# EAGLE board ATtiny85 Programmer (EAGLE 6.3)
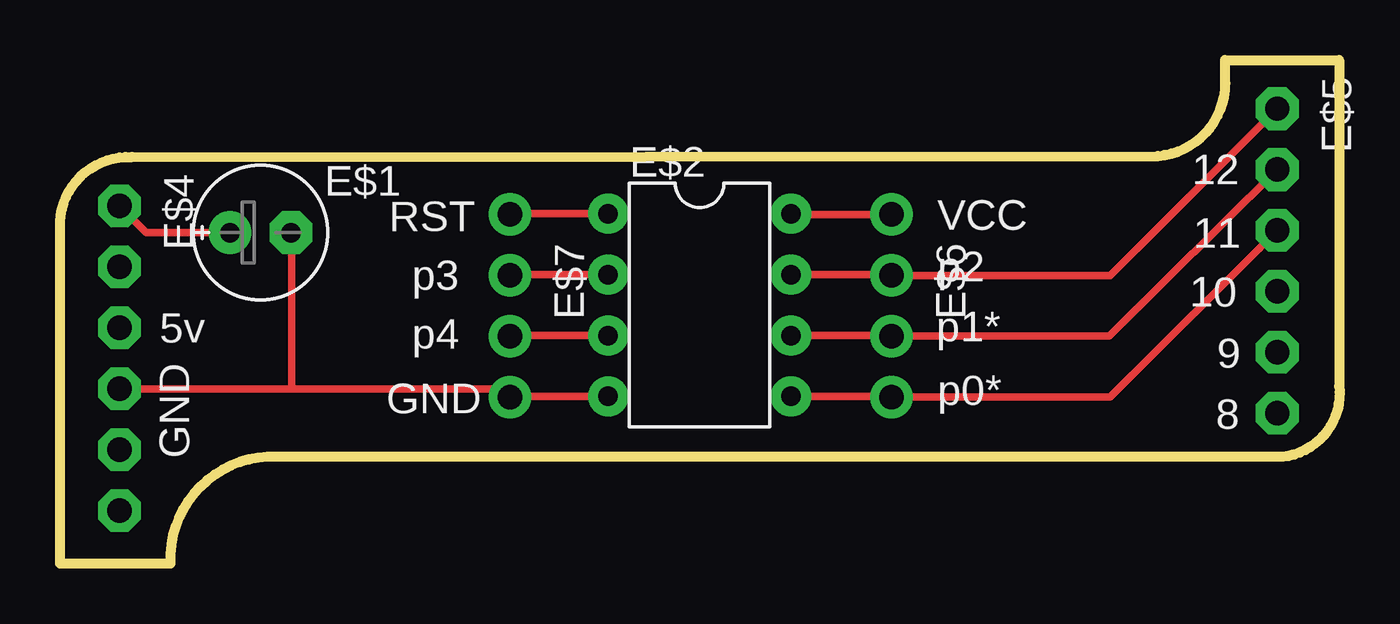
[diagram p0: board, top side]
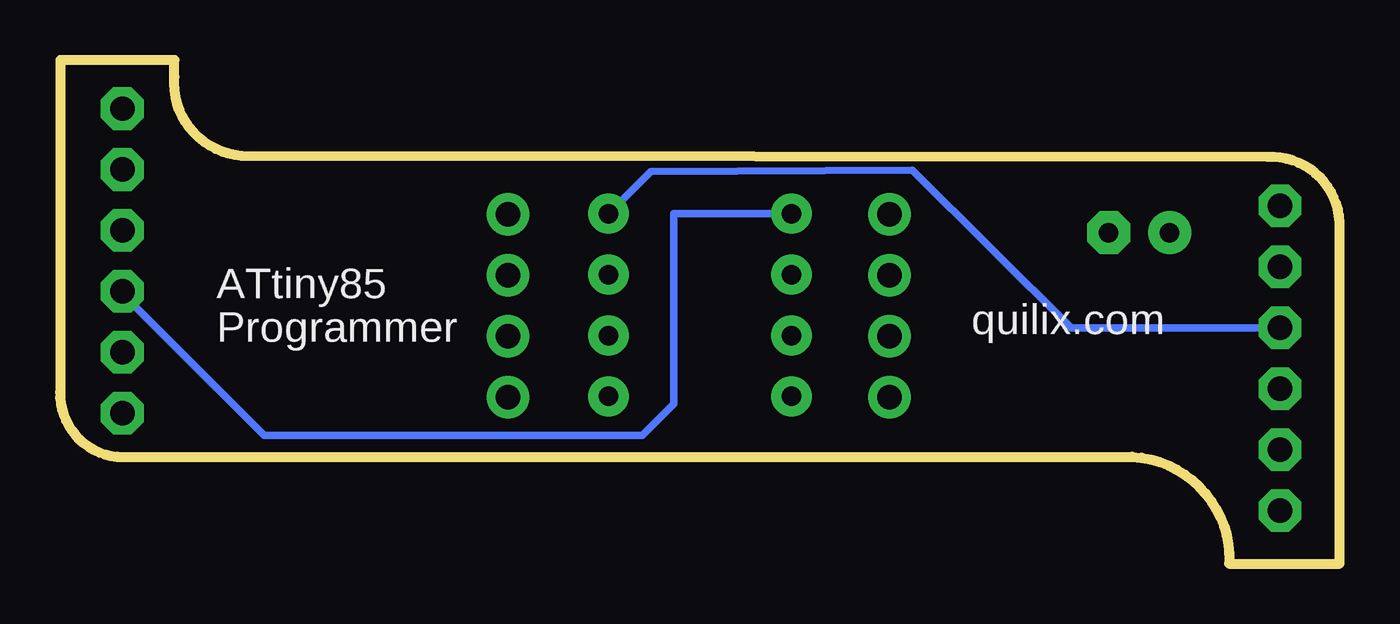
[diagram p1: board, bottom side, seen from below]

Size 53.32 x 21 mm. Coordinates in mm from the lower left corner, seen from the top.
Outline: 53.3,21 53.3,7.4 arc-90 50.95,4.45 8.65,4.45 arc90 4.6,0 0,0 0,14.25 arc-90 3,16.95 45.75,17 arc90 48.55,20.3 48.55,21 53.3,21
Copper layers (1*16): Top 0.035mm / dielectric 1.5mm / Bottom 0.035mm
Design rules "default": minimum track width 10mil, minimum drill 24mil, track to track 8mil, track to pad 8mil, pad to pad 8mil, via to via 8mil, smd to smd 8mil, copper to edge 40mil, drill to drill 8mil, minimum pad ring 10mil, minimum via ring 8mil, stop-mask expansion 4mil, vias tented up to drill 0mil, thermal gap 10mil

## Footprints (pad centres in the part's own frame; a part is rotated, then mirrored left to right if it is on the bottom)
E2,5-6E = drill 0.813 pad 1.778: + -1.27,0 | drill 0.813 pad 1.778 octagon: - 1.27,0
DIL08-ROUND = drill 0.813 pad 1.676: 1 -3.81,-3.81; 2 -1.27,-3.81; 3 1.27,-3.81; 4 3.81,-3.81; 5 3.81,3.81; 6 1.27,3.81; 7 -1.27,3.81; 8 -3.81,3.81
1X06-CLEANBIG = drill 1.016 pad 1.778 octagon: 1 -6.35,0; 2 -3.81,0; 3 -1.27,0; 4 1.27,0; 5 3.81,0; 6 6.35,0
1X04-CLEANBIG = drill 1.016 pad 1.778: 1 -3.81,0; 2 -1.27,0; 3 1.27,0; 4 3.81,0

## Placement (x,y rotation side)
E$1  [E2,5-6E]  8.35,13.8 0 top
E$2  [DIL08-ROUND]  26.65,10.78 270 top
E$4  [1X06-CLEANBIG]  2.48,8.56 270 top
E$5  [1X06-CLEANBIG]  50.72,12.62 270 top
E$6  [1X04-CLEANBIG]  34.65,10.75 270 top
E$7  [1X04-CLEANBIG]  18.75,10.75 270 top

## Library data of the parts
E$1 E$2 E$4-E$7 = adafruit

## Nets
S$1: E$2.7 E$5.1 E$6.2
S$2: E$2.6 E$5.2 E$6.3
S$3: E$2.5 E$5.3 E$6.4
S$4: E$2.1 E$5.4 E$7.1
S$5: E$1.+ E$4.1
S$6: E$1.- E$2.4 E$4.4 E$7.4
S$7: E$2.8 E$4.3 E$6.1
S$8: E$2.2 E$7.2
S$9: E$2.3 E$7.3

## Tracks (layer width: path | path; a pad name or v marks a point on that pad's centre or on a via)
S$1
  Top 0.305: E$5.1 43.77,12.02 E$6.2 34.62,12.05 E$2.7
S$2
  Top 0.305: E$5.2 43.72,9.48 E$6.3 34.62,9.51 E$2.6
S$3
  Top 0.305: E$5.3 43.77,6.94 E$6.4 34.62,6.97 E$2.5
S$4
  Top 0.305: E$2.1 18.78,14.59 E$7.1
  Bottom 0.305: E$2.1 27.75,14.59 27.75,6.65 29.05,5.35 44.8,5.35 50.72,11.27 E$5.4
S$5
  Top 0.305: E$4.1 3.59,13.8 E$1.+
S$6
  Top 0.305: 9.65,7.29 18.4,7.29 E$7.4 18.78,6.97 E$2.4 | 9.65,7.29 E$4.4 | E$1.- 9.65,13.77 9.65,7.29
S$7
  Top 0.305: E$6.1 30.49,14.56 E$2.8
  Bottom 0.305: E$4.3 11.18,9.83 17.8,16.4 28.7,16.35 E$2.8
S$8
  Top 0.305: E$2.2 18.78,12.05 E$7.2
S$9
  Top 0.305: E$2.3 18.78,9.51 E$7.3

## Text on the board
_tsilk: 12 | RST | VCC | 11 | p3 | p2 | 10 | 5v | p4 | p1* | 9 | GND | p0* | 8 | GND
_bsilk: ATtiny85 | Programmer | quilix.com